# Altium PCB LEDLights.PcbDoc
Units mm, origin at the board's own origin, x right, y up, seen from the top; angles counter-clockwise.
Board outline 150 x 12 mm, 2 copper layers (Top Layer, Bottom Layer); 14 components, 8 nets, 38 pads, 322 vias.
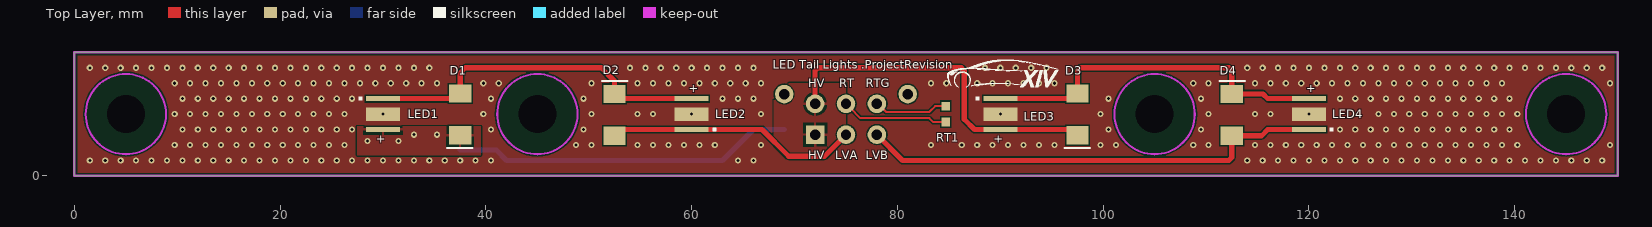
[diagram p0: Top Layer view]
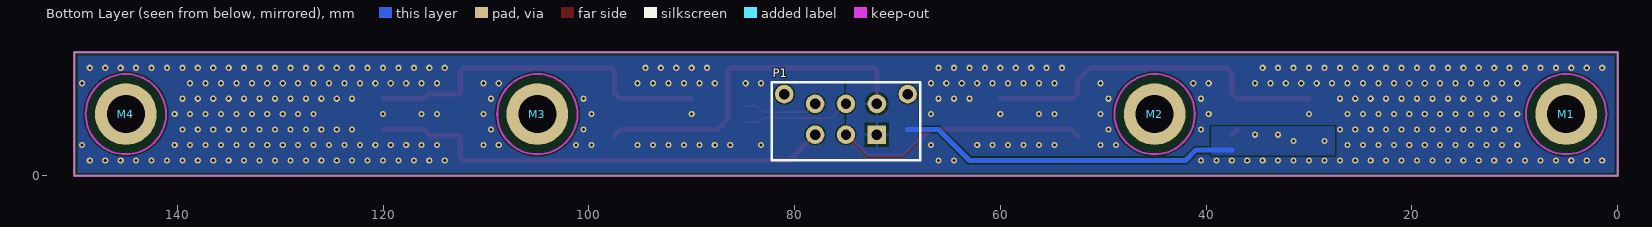
[diagram p1: Bottom Layer view, seen from below]
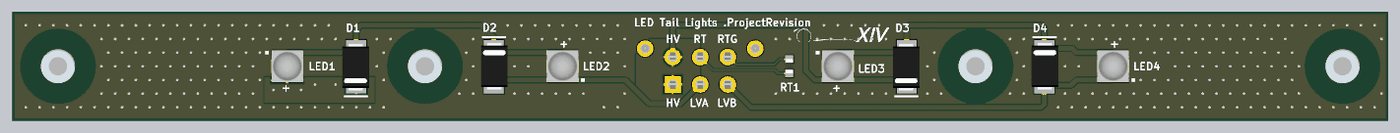
[diagram p2: 3D render of the assembled board from above, using the file's embedded part models]
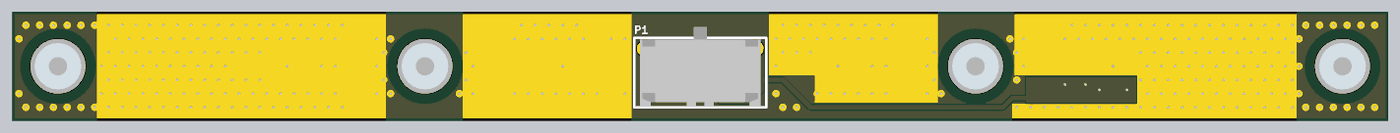
[diagram p3: 3D render of the assembled board from below, using the file's embedded part models]

## Layer stack, top to bottom
Top Solder: solder mask 0.0102, Solder Resist, Dk 3.5
Top Layer: signal copper 0.0356
Dielectric 1: dielectric 0.32, FR-4, Dk 4.8
Bottom Layer: signal copper 0.0356
Bottom Solder: solder mask 0.0102, Solder Resist, Dk 3.5

## Board outline
0,0 150,0 150,12 0,12

## Design rules (kind name [scope] priority, off if disabled: settings)
BoardOutlineClearance [All] p1: gap=0.3 ignorepadtopadclearanceinfootprint=FALSE
Clearance "Stitching THERMAL_PAD" [IsStitchingVia and InNet('THERMAL_PAD') vs (IsVia and (Not IsStitchingVia)) Or IsPad] p1: gap=0.127 ignorepadtopadclearanceinfootprint=FALSE
Clearance [All] p2: gap=0.127 ignorepadtopadclearanceinfootprint=FALSE except(0.13: Arc-Via Track-Via SMDPad-Via THPad-Via Via-Via)
HoleSize [All] p1: absolutevalues=TRUE maxlimit=6.3 minlimit=0.2 maxpercent=80.000 minpercent=20.000
PolygonConnect PolygonConnect_Direct [InNet('THERMAL_PAD')] p1: connectstyle=Direct reliefconductorwidth=0.254 reliefentries=4 polygonreliefangle="90 Angle" airgapwidth=0.254
PolygonConnect [All] p2: thpad.connectstyle=Relief thpad.reliefconductorwidth=0.254 thpad.reliefentries=4 thpad.polygonreliefangle="90 Angle" thpad.airgapwidth=0.254 smdpad.connectstyle=Relief smdpad.reliefconductorwidth=0.254 smdpad.reliefentries=4 smdpad.polygonreliefangle="90 Angle" smdpad.airgapwidth=0.254 via.connectstyle=Direct via.reliefconductorwidth=0.254 via.reliefentries=4 via.polygonreliefangle="90 Angle" via.airgapwidth=0.254
RoutingVias [All] p1: holewidth=0.711 width=1.27 viastyle="Through Hole" minholewidth=0.3 minwidth=0.6 maxholewidth=0.3 maxwidth=0.6
SilkToSolderMaskClearance [IsPad] p1: minsilkscreentomaskgap=0.2 clearancetoexposedcopper=TRUE
SolderMaskExpansion SolderMaskExpansion_Via_Thermal [(InNet('THERMAL_PAD') AND IsVia)] p1: expansion=0.102 istentingtop=TRUE useseparateexpansions=TRUE expansionbottom=0.102 istentingbottom=FALSE
SolderMaskExpansion SolderMaskExpansion_Via [IsVia] p2: expansion=0.102 istentingtop=TRUE
SolderMaskExpansion [All] p3: expansion=0.102 istentingtop=FALSE
Width [All] p1: maxlimit=3 minlimit=0.089 preferedwidth=0.2
28 further rules are at their usual default settings.

## Components (designator, comment, footprint, x,y, rotation, side; value= is the part's Value field where it differs from the comment)
D1 "DIODE ZENER 3.3V 3W DO-214AA" "DO-214AA Diode" 37.5,8 r270 top
D2 "DIODE ZENER 3.3V 3W DO-214AA" "DO-214AA Diode" 52.5,3.9 r90 top
D3 "DIODE ZENER 3.3V 3W DO-214AA" "DO-214AA Diode" 97.5,8 r270 top
D4 "DIODE ZENER 3.3V 3W DO-214AA" "DO-214AA Diode" 112.5,3.9 r90 top
LED1 "LED RED XLAMP XP-E2 1414" "LED XLAMP XP-E2 1414" 30,6 r90 top
LED2 "LED RED XLAMP XP-E2 1414" "LED XLAMP XP-E2 1414" 60,6 r270 top
LED3 "LED RED XLAMP XP-E2 1414" "LED XLAMP XP-E2 1414" 90,6 r90 top
LED4 "LED RED XLAMP XP-E2 1414" "LED XLAMP XP-E2 1414" 120,6 r270 top
M1 "STANDOFF RND M2.5X0.45 STEEL 5MM" "M2.5 Standoff" 5,6 r180 bottom
M2 "STANDOFF RND M2.5X0.45 STEEL 5MM" "M2.5 Standoff" 45,6 r180 bottom
M3 "STANDOFF RND M2.5X0.45 STEEL 5MM" "M2.5 Standoff" 105,6 r180 bottom
M4 "STANDOFF RND M2.5X0.45 STEEL 5MM" "M2.5 Standoff" 145,6 r180 bottom
P1 "CONN 6POS MICRO-FIT 2ROW 3mm" "CONN, 6POS MICRO-FIT" 72,4 r180 bottom
RT1 "NTC THERMISTORS 10K 0603 SMD" "RES, 0603" 84.7,6 r270 top

## Footprints (in the part's own frame and the unit in brackets; to place one, negate y for a bottom-side part, rotate by r counter-clockwise, add the part's x,y. Pads: shape width x height; smd on the part's side, far side on the other; paste and mask are expansions set on the pad)
"CONN, 6POS MICRO-FIT" [mm]
  rect 1.8x1.8 hole 1.02: 1(0,0)
  round 1.8 hole 1.02: 2(-3,0) 3(-6,0) 4(0,3) 5(-3,3) 6(-6,3) ""(-9,3.94) ""(3,3.94)
  silkscreen extent -10.2,-2.5 4.2,5.1, body extent -9.57,-2.44 3.58,6.33, height 9.92
"DO-214AA Diode" [mil] "Zener Diode 16V 5W SMBJ5353B-TP"
  rect 70x85 smd: 1(0,0) 2(160,0)
  silkscreen extent 209,-50 209,47, body extent -21,-60 187,55, height 95
"LED XLAMP XP-E2 1414" [mm]
  rect 0.5x3.3 smd: 1(-1.5,0) 3(1.5,0)
  rect 1.3x3.3 smd: 2(0,0)
  silkscreen extent 1.3,2 1.7,2.4, body extent -1.73,-1.73 1.73,1.73, height 2.28
"M2.5 Standoff" [mm]
  round 0 hole 3.7: ""(0,0)
  round 6 smd: ""(0,0)
  Top Layer keep-out circle w0.2: c0,0 r3.9
  Bottom Layer keep-out circle w0.2: c0,0 r3.9
  body extent -2.55,-2.55 2.55,2.55, height 5
"RES, 0603" [mm] "Chip Resistor, 2-Leads, Body 1.60x0.80mm, IPC Medium Density"
  rect 0.85x0.85 smd: 1(-0.775,0) 2(0.775,0)
  body extent -0.8,-0.4 0.8,0.4, height 0.55

## Part data
D1 D2 D3 D4: "Diode Zener Single 3.3V 5% 3000mW Automotive 2-Pin SMB T/R", Case/Package=SMB, Forward Voltage=1.5V, Manufacturer="ON Semiconductor", Manufacturer Part Number=SZ1SMB5913BT3G, Max Operating Temperature=150°C, Max Power Dissipation=550mW, Max Reverse Leakage Current=100uA, Min Operating Temperature=-65°C, Package Quantity=2500, Supplier Part Number 1=SZ1SMB5913BT3GOSCT-ND, Test Current=113.6mA, Tolerance=5%, Zener Voltage=3.3V, Category="Zener Diodes", ComponentLink1Description=http://www.mouser.com/ds/2/308/1SMB5913BT3-D-108682.pdf?src-supplier=Mouser, ComponentLink1URL=http://www.mouser.com/ds/2/308/1SMB5913BT3-D-108682.pdf?src-supplier=Mouser, ComponentLink2Description=https://www.onsemi.com/pub/Collateral/1SMB5913BT3-D.PDF?src-supplier=Digi-Key, ComponentLink2URL=https://www.onsemi.com/pub/Collateral/1SMB5913BT3-D.PDF?src-supplier=Digi-Key, ComponentLink3Description=http://www.farnell.com/datasheets/2160707.pdf?src-supplier=Newark, ComponentLink3URL=http://www.farnell.com/datasheets/2160707.pdf?src-supplier=Newark, ComponentLink4Description=http://www.onsemi.com/pub/Collateral/1SMB5913BT3-D.PDF?src-supplier=Avnet, ComponentLink4URL=http://www.onsemi.com/pub/Collateral/1SMB5913BT3-D.PDF?src-supplier=Avnet, Element Configuration=Single, Halogen Free="Halogen Free", Height=2.3mm, Impedance=10R, Lead Free="Lead Free", Length=4.32mm, Number of Pins=2, Packaging="Tape and Reel", Peak Reverse Current=100uA, Power Dissipation=550mW, Pricing 1="1=0.62000, 10=0.54500, 25=0.51160, 100=0.37130, 250=0.35804, 500=0.31020, 1000=0.26400 (USD)", Radiation Hardening=No, RoHS=Yes, Stock 1=2894, Supplier 1=Digi-Key, Voltage Tolerance=5%, Width=3.56mm, Zener Current=100uA
LED1 LED2 LED3 LED4: "LED Lighting Color XLamp® XP-E2 Red 623nm (620nm ~ 625nm) 1414 (3535 Metric)", Case/Package=SMD/SMT, Color=Red, Forward Voltage=2.2V, Manufacturer=Cree, Manufacturer Part Number=XPEBRD-L1-0000-00902, Max Current Rating=1A, Supplier Part Number 1=XPEBRD-L1-0000-00902CT-ND, Test Current=350mA, Test Temperature=25°C, Thermal Resistance of Package=5°C/W, Lead Free="Lead Free", Mount="Surface Mount", Packaging="Tape and Reel", Pricing 1="1 = 2.00000, 10 = 1.90000, 100 = 1.69980, 250 = 1.54584, 500 = 1.44786 (USD)", RoHS=Yes, Stock 1=1640, Supplier 1=Digi-Key, Viewing Angle=130°, Wavelength=625nm
M1 M2 M3 M4: Manufacturer="Wurth Electronics", Manufacturer Part Number=9774050151R, Supplier Part Number 1=732-7095-1-ND, Length=0.252inch, Material=Steel, Outside Diameter=0.201inch, Plating=Tin, Pricing 1="1 = 1.09000, 10 = 1.03000, 50 = 0.91800, 100 = 0.84000 (USD)", REACH SVHC=Unknown, RoHS=Yes, Screw-Thread Size=M2.5x0.45, Standoff Height=5mm, Stock 1=24846, Supplier 1=Digi-Key, Threaded/Unthreaded=Threaded
P1: "Header; 2 Row; Vertical; Polarizing Peg; 6 Pin; Tin Plate; SMT/Glow Wire; Kinked Leads", Color=Black, Contact Resistance=10mR, Flammability Rating="UL94 V-0", Manufacturer=Molex, Manufacturer Part Number=0430450612, Max Operating Temperature=105°C, Max Voltage Rating (AC)=250V, Min Operating Temperature=-40°C, Supplier Part Number 1=WM1791-ND, Category="Headers and Wire Housings", ComponentLink1Description=https://datasheet.ciiva.com/6814/430450612-sd-6814051.pdf?src-supplier=Digi-Key, ComponentLink1URL=https://datasheet.ciiva.com/6814/430450612-sd-6814051.pdf?src-supplier=Digi-Key, ComponentLink2Description=https://datasheet.ciiva.com/16498/0430450612-pcb-headers-16498085.pdf?src-supplier=Avnet+Asia, ComponentLink2URL=https://datasheet.ciiva.com/16498/0430450612-pcb-headers-16498085.pdf?src-supplier=Avnet+Asia, ComponentLink3Description=https://datasheet.ciiva.com/3933/94170430450612-pcb-headers-3933226.pdf?src-supplier=Arrow, ComponentLink3URL=https://datasheet.ciiva.com/3933/94170430450612-pcb-headers-3933226.pdf?src-supplier=Arrow, Connector Type="Male Pin", Contact Material=Brass, Contact Plating=Tin, Depth=8.77mm, Fastening Type=Ramp, Housing Color=Black, Housing Material=Polymer, Length=13.15mm, Mount="Through Hole", Number of Contacts=6, Number of Ports=1, Number of Positions=6, Number of Rows=2, Number of Terminals=6, Orientation=Straight, Packaging=Tray, Pitch=3mm, Pricing 1="1=1.33000, 10=1.17000, 100=1.00960, 500=0.82602, 1000=0.73424, 5000=0.64246, 10000=0.61034 (USD)", RoHS=Yes, Row Spacing=0.118inch, Stock 1=8467, Supplier 1=Digi-Key, Termination=Solder
RT1: "NTC THERMISTORS 10KOHM 1608 SMD", B Value Tolerance=±1%, Manufacturer="Murata Electronics North America", Manufacturer Part Number=NCU18XH103F60RB, Operating Temperature="-40°C ~ 125°C", Package / Case="0603 (1608 Metric)", Resistance in Ohms @ 25°C=10k, Supplier Part Number 1=490-16279-2-ND, B0/50=-, B25/50=3380K, B25/75=-, B25/85=3434K, B25/100=3455K, Category="Sensors, Transducers", ComponentLink1Description=https://www.murata.com/~/media/webrenewal/support/library/catalog/products/thermistor/r03e.ashx, ComponentLink1URL=https://www.murata.com/~/media/webrenewal/support/library/catalog/products/thermistor/r03e.ashx, Length - Lead Wire=-, Mounting Type="Surface Mount", Packaging="Tape & Reel (TR)", Part Status=Active, Pricing 1="4000=0.06771, 8000=0.05974, 12000=0.05775, 20000=0.05675, 28000=0.05576 (CAD)", Resistance Tolerance=±1%, RoHS="Request Inventory Verification", Stock 1=0, Supplier 1=Digi-Key

## Via types
v1: diameter 0.6, hole 0.3, Top Layer to Bottom Layer, tented top, 318 vias
v2: diameter 0.6, hole 0.3, Top Layer to Bottom Layer, tented both sides, 4 vias

## Nets (pads, with @x,y where several pads share a name; then routed paths per layer and width w, separated by ;. In a path a pad name is that pad's centre, name@x,y a point inside that pad or via, vN(x,y) a via of type N, cw(c..) or ccw(c..) an arc to the next point about the centre after c; other vN are vias at no path point)
LED_HV: D1.2 D3.2 LED1.1 LED3.1 P1.1 P1.4 | length 68.3
  Top Layer w0.5: D1.2@36.936,4.5 D1.2 ; P1.4 72,10.207 72.293,10.5 86.207,10.5 86.5,10.207 86.5,5.5 87.5,4.5 LED3.1 96.936,4.5 D3.2
  Bottom Layer w0.5: 37.5,2.5 41,2.5 42,1.5 63,1.5 66,4.5 69,4.5
  other v2: 28.5,3.4 31.5,3.4 33,4 35.25,4
LED_LV_A: D2.1 LED2.3 P1.2 | length 24.7
  Top Layer w0.5: D2.1 53.1,4.5 LED2.3 66.84,4.5 69.44,1.9 72.9,1.9 P1.2
LED_LV_B: D4.1 LED4.3 P1.3 | length 45.5
  Top Layer w0.5: P1.3 80.5,1.5 112.207,1.5 112.5,1.793 D4.1 115.4,3.9 116,4.5 LED4.3
NetD1_1: D1.1 D2.2 LED1.3 LED2.1 | length 34.4
  Top Layer w0.5: LED1.3 37,7.5 D1.1 37.5,10 38,10.5 51.207,10.5 52.5,9.207 D2.2 52.964,7.5 LED2.1
NetD3_1: D3.1 D4.2 LED3.3 LED4.1 | length 35.1
  Top Layer w0.5: LED3.3 97,7.5 D3.1 97.5,10.207 97.793,10.5 112.207,10.5 112.5,10.207 D4.2 115.536,7.964 116,7.5 118.454,7.5 LED4.1
NetP1_5: P1.5 RT1.2 | length 10.7
  Top Layer w0.2: P1.5 75.4,7 75.4,6.6 76.4,5.6 83.1,5.6 83.475,5.225 RT1.2
NetP1_6: P1.6 RT1.1 | length 7.3
  Top Layer w0.2: P1.6 78.097,7 78.897,6.2 83.1,6.2 83.675,6.775 RT1.1
THERMAL_PAD: LED1.2 LED2.2 LED3.2 LED4.2
  other v1: 1.5,1.5 3,1.5 4.5,1.5 6,1.5 7.5,1.5 9,1.5 10.5,1.5 12,1.5 13.5,1.5 15,1.5 16.5,1.5 18,1.5 19.5,1.5 21,1.5 22.5,1.5 24,1.5 25.5,1.5 27,1.5 28.5,1.5 30,1.5 31.5,1.5 33,1.5 34.5,1.5 36,1.5 37.5,1.5 39,1.5 40.5,1.5 64.5,1.5 66,1.5 114,1.5 115.5,1.5 117,1.5 118.5,1.5 120,1.5 121.5,1.5 123,1.5 124.5,1.5 126,1.5 127.5,1.5 129,1.5 130.5,1.5 132,1.5 133.5,1.5 135,1.5 136.5,1.5 138,1.5 139.5,1.5 141,1.5 142.5,1.5 144,1.5 145.5,1.5 147,1.5 148.5,1.5 9.75,3 11.25,3 12.75,3 14.25,3 15.75,3 17.25,3 18.75,3 20.25,3 21.75,3 23.25,3 24.75,3 26.25,3 48.75,3 50.25,3 54.75,3 56.25,3 57.75,3 59.25,3 60.75,3 62.25,3 66.75,3 83.25,3 86.25,3 87.75,3 89.25,3 90.75,3 92.25,3 93.75,3 95.25,3 99.75,3 101.25,3 108.75,3 110.25,3 114.75,3 116.25,3 117.75,3 119.25,3 120.75,3 122.25,3 123.75,3 125.25,3 126.75,3 128.25,3 129.75,3 131.25,3 132.75,3 134.25,3 135.75,3 137.25,3 138.75,3 140.25,3 149.25,3 10.5,4.5 12,4.5 13.5,4.5 15,4.5 16.5,4.5 18,4.5 19.5,4.5 21,4.5 22.5,4.5 24,4.5 25.5,4.5 27,4.5 40.5,4.5 49.5,4.5 100.5,4.5 109.5,4.5 123,4.5 124.5,4.5 126,4.5 127.5,4.5 129,4.5 130.5,4.5 132,4.5 133.5,4.5 135,4.5 136.5,4.5 138,4.5 139.5,4.5 9.75,6 11.25,6 12.75,6 14.25,6 15.75,6 17.25,6 18.75,6 20.25,6 21.75,6 23.25,6 24.75,6 26.25,6 30,6 39.75,6 50.25,6 54.75,6 56.25,6 60,6 66.75,6 90,6 99.75,6 110.25,6 114.75,6 116.25,6 120,6 126.75,6 128.25,6 129.75,6 131.25,6 132.75,6 134.25,6 135.75,6 137.25,6 138.75,6 140.25,6 10.5,7.5 12,7.5 13.5,7.5 15,7.5 16.5,7.5 18,7.5 19.5,7.5 21,7.5 22.5,7.5 24,7.5 25.5,7.5 27,7.5 40.5,7.5 49.5,7.5 63,7.5 64.5,7.5 66,7.5 100.5,7.5 109.5,7.5 123,7.5 124.5,7.5 126,7.5 127.5,7.5 129,7.5 130.5,7.5 132,7.5 133.5,7.5 135,7.5 136.5,7.5 138,7.5 139.5,7.5 9.75,9 11.25,9 12.75,9 14.25,9 15.75,9 17.25,9 18.75,9 20.25,9 21.75,9 23.25,9 24.75,9 26.25,9 27.75,9 29.25,9 30.75,9 32.25,9 33.75,9 35.25,9 39.75,9 41.25,9 50.25,9 54.75,9 56.25,9 57.75,9 59.25,9 60.75,9 62.25,9 63.75,9 65.25,9 66.75,9 83.25,9 84.75,9 87.75,9 89.25,9 90.75,9 92.25,9 93.75,9 95.25,9 108.75,9 110.25,9 114.75,9 116.25,9 117.75,9 119.25,9 120.75,9 122.25,9 123.75,9 125.25,9 126.75,9 128.25,9 129.75,9 131.25,9 132.75,9 134.25,9 135.75,9 137.25,9 138.75,9 149.25,9 1.5,10.5 3,10.5 4.5,10.5 6,10.5 7.5,10.5 9,10.5 10.5,10.5 12,10.5 13.5,10.5 15,10.5 16.5,10.5 18,10.5 19.5,10.5 21,10.5 22.5,10.5 24,10.5 25.5,10.5 27,10.5 28.5,10.5 30,10.5 31.5,10.5 33,10.5 34.5,10.5 54,10.5 55.5,10.5 57,10.5 58.5,10.5 60,10.5 61.5,10.5 63,10.5 64.5,10.5 66,10.5 88.5,10.5 90,10.5 91.5,10.5 93,10.5 94.5,10.5 114,10.5 115.5,10.5 117,10.5 118.5,10.5 120,10.5 121.5,10.5 123,10.5 124.5,10.5 126,10.5 127.5,10.5 129,10.5 130.5,10.5 132,10.5 133.5,10.5 135,10.5 136.5,10.5 138,10.5 139.5,10.5 141,10.5 142.5,10.5 144,10.5 145.5,10.5 147,10.5 148.5,10.5
pads on no net: M1. M2. M3. M4. P1.

## Polygon pours and split planes (outlines as drawn)
THERMAL_PAD on Top Layer "THERMAL_PAD_L01_P022" (solid, remove dead copper, pour order 22): 150,12 150,0 0,0 0,12
THERMAL_PAD on Top Layer "THERMAL_PAD_L01_P021" (solid, remove dead copper, pour order 21): 0,12 0,0 150,0 150,12
LED_HV on Top Layer "LED_HV_L01_P020" (solid, pour order 20): 68,9 68,3.34 69.44,1.9 72.9,1.9 75,4 75,9
LED_HV on Top Layer "LED_HV_L01_P019" (solid, pour order 19): 27.5,4.8 39.5,4.8 39.5,2 27.5,2
THERMAL_PAD on Bottom Layer "THERMAL_PAD_L02_P025" (solid, remove dead copper, pour order 25): 0,12 150,12 150,0 0,0
LED_HV on Bottom Layer "LED_HV_L02_P024" (solid, pour order 24): 68,9 68,3.34 69.44,1.9 72.9,1.9 75,4 75,9
LED_HV on Bottom Layer "LED_HV_L02_P023" (solid, pour order 23): 27.5,4.8 39.5,4.8 39.5,2 27.5,2

## Keep-outs
Keep-Out Layer:
  the board outline again, w0.254

## Silkscreen, mask and mechanical layers (free items; w line width, h text height)
Top Overlay:
  drawing of 9 lines, arcs and shapes, not listed
  text "LED Tail Lights .ProjectRevision" at 67.869,10.417 h0.8
  text "HV" at 71.334,8.6 h0.8
  text "RT" at 74.334,8.6 h0.8
  text "RTG" at 76.934,8.6 h0.8
  text "HV" at 71.334,1.6 h0.8
  text "LVA" at 73.934,1.6 h0.8
  text "LVB" at 76.934,1.6 h0.8
Bottom Solder:
  rectangle: 82.5,0 100.9,12
  rectangle: 61.5,5 67.5,12
  rectangle: 49.1,2 62.5,12
  rectangle: 27,0 41,1.9
  rectangle: 109.25,0 140.75,12
  rectangle: 27.3,5 40.75,12
  rectangle: 10,0 27.4,12

## Text inside footprints (layer, text, board x,y; h text height)
LED1: Top Overlay "+" at 30.267,3.9 h0.8 r180
LED2: Top Overlay "+" at 59.733,8.1 h0.8
LED3: Top Overlay "+" at 90.267,3.9 h0.8 r180
LED4: Top Overlay "+" at 119.733,8.1 h0.8